# EAGLE board truSDX-TCXO-Upgrade-RevA (EAGLE 9.6.2)
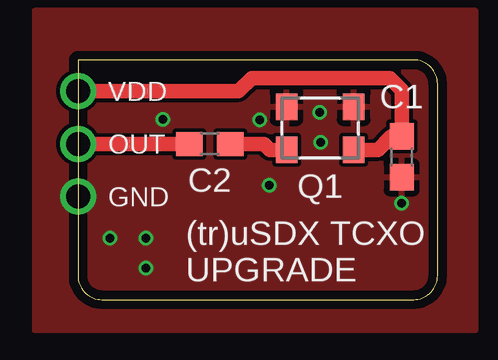
[diagram p0: board, top side]
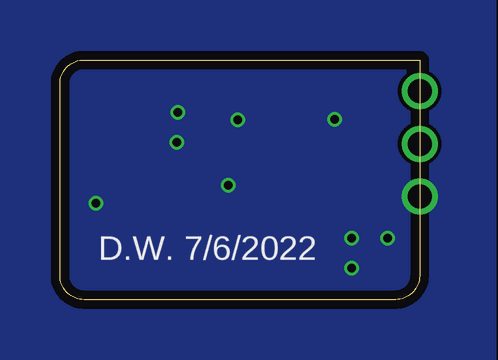
[diagram p1: board, bottom side, seen from below]

Size 15 x 10 mm. Coordinates in mm from the lower left corner, seen from the top.
Outline: 15,1 15,9 arc90 14,10 0,10 0,1 arc90 1,0 14,0 arc90 15,1
Copper layers (1*16): Top 0.035559375mm / dielectric 1.6mm / Bottom 0.035559375mm
Design rules "oshpark-2layer *": minimum track width 6mil, minimum drill 10mil, track to track 6mil, track to pad 6mil, pad to pad 6mil, via to via 6mil, smd to smd 6mil, copper to edge 15mil, drill to drill 6mil, minimum pad ring 5mil, minimum via ring 5mil, stop-mask expansion 2.5mil, vias tented up to drill 20mil, thermal gap 10mil

## Footprints (pad centres in the part's own frame; a part is rotated, then mirrored left to right if it is on the bottom)
C0603 = smd 1.1 x 1: 1 -0.85,0; 2 0.85,0
3.2X2.5_KXO-84-TCXO = smd 0.9 x 1.1: 1 -1.4,-0.9; 2 1.4,-0.9; 3 1.4,0.9; 4 -1.4,0.9

## Placement (x,y rotation side)
C1  100n  [C0603]  13.5,5.96 270 top
C2  100n  [C0603]  5.5,6.5 180 top
Q1  [3.2X2.5_KXO-84-TCXO]  10.1,7.15 180 top

## Library data of the parts
C1 C2 = adafruit
Q1 = crystal-geyer_V1_0

## Nets
GND: C1.2 Q1.1 Q1.2
N$1: C2.1 Q1.3
OUT: C2.2
VDD: C1.1 Q1.4

## Tracks (layer width: path | path; a pad name or v marks a point on that pad's centre or on a via)
GND  (via drill 0.35, 1)
  other vias: 0,4.3 10.08,7.82 10.12,6.56 13.5,4.03 7.58,7.5 7.99,4.78 3.54,7.53 1.33,2.56 2.83,1.31 2.83,2.56
  pour Top: -1.81,12.05 -1.81,-1.27 16.59,-1.27 16.59,12.05
  pour Bottom: -3.08,13.32 -3.08,-2.54 17.86,-2.54 17.86,13.32
N$1
  Top 0.61: Q1.3 8,6.25 7.75,6.5 C2.1
OUT  (via drill 1)
  Top 0.61: v0,6.5 C2.2
VDD  (via drill 1)
  Top 0.61: v0,8.7 6.7,8.7 7.25,9.25 13,9.25 13.5,8.75 C1.1 13.05,6.8 12.5,6.25 Q1.4

## Text on the board
tNames: VDD | OUT | GND | (tr)uSDX TCXO / UPGRADE
bNames: D.W. 7/6/2022